# Altium PCB 0007-Optical_Tracker.pcblib.pcbdoc
Units mil, origin at the board's own origin, x right, y up, seen from the top; angles counter-clockwise.
Board outline 6000 x 4000 mil, 2 copper layers (Top Layer, Bottom Layer); 22 components, 0 nets, 193 pads, 0 vias.
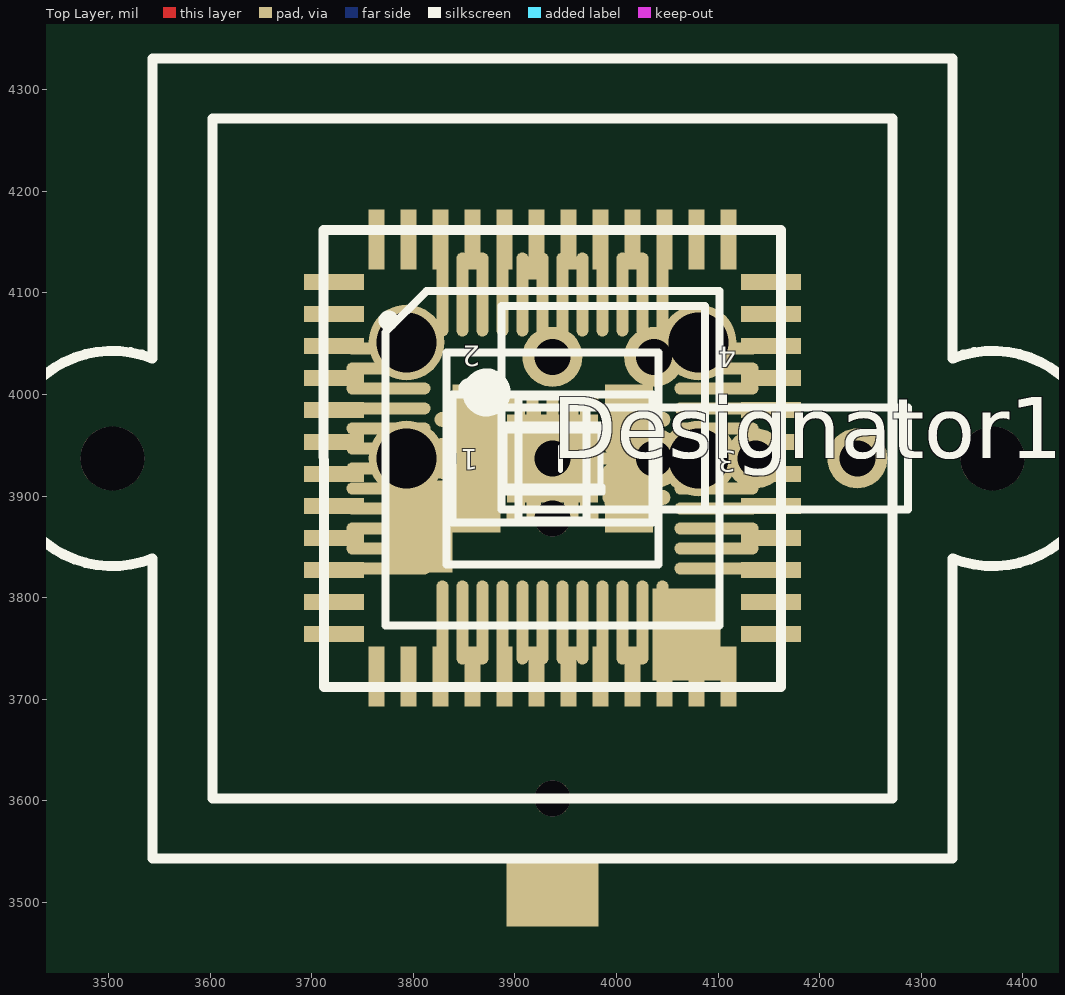
[diagram p0: Top Layer view]
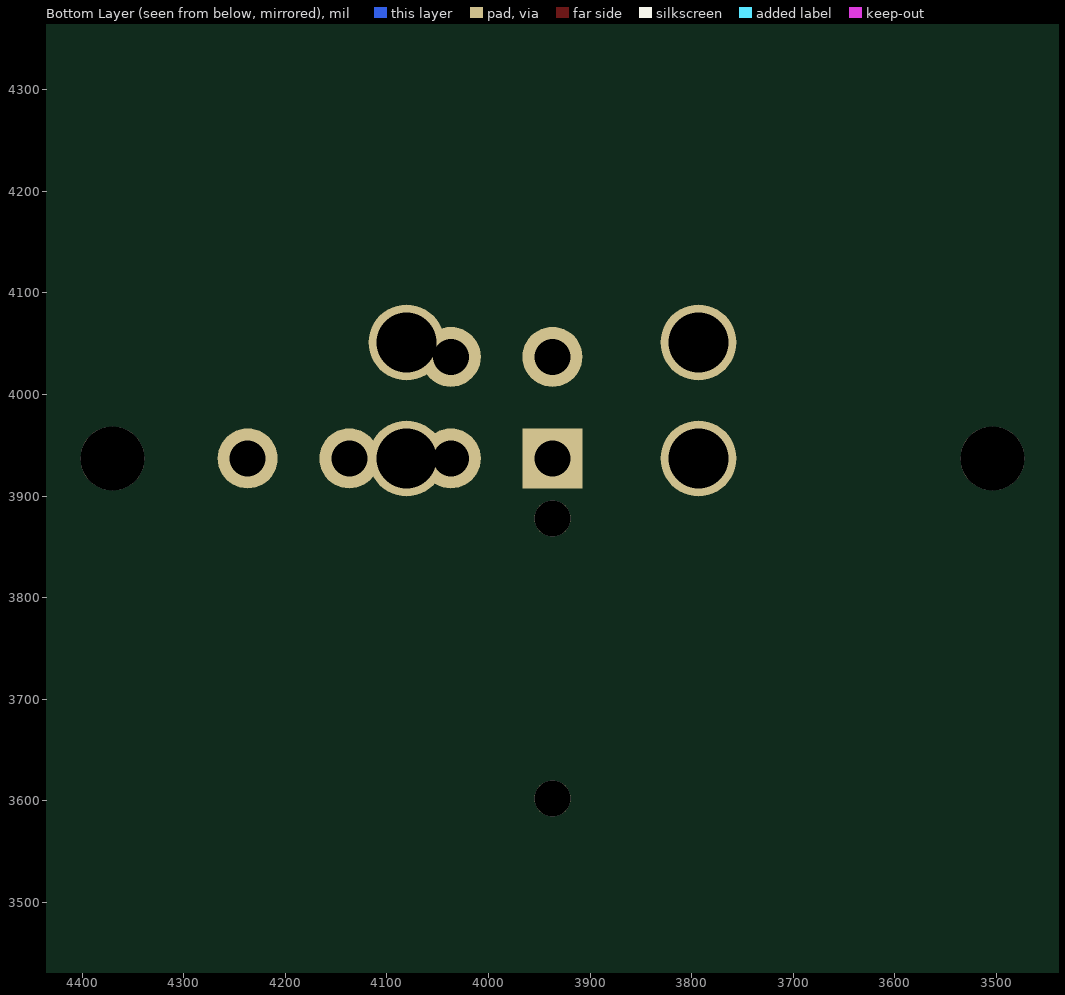
[diagram p1: Bottom Layer view, seen from below]

## Layer stack, top to bottom
Top Solder: solder mask 0.4, Solder Resist, Dk 3.5
Top Layer: signal copper 1.4
Dielectric 1: dielectric 12.6, FR-4, Dk 4.8
Bottom Layer: signal copper 1.4
Bottom Solder: solder mask 0.4, Solder Resist, Dk 3.5

## Board outline
1000,1000 7000,1000 7000,5000 1000,5000

## Design rules (kind name [scope] priority, off if disabled: settings)
AssemblyTestPointUsage [All] p0: scope1count=1 scope1_0_kind=Board scope1_0_value=Board scope2count=1 scope2_0_kind=Board scope2_0_value=Board commentlength=0
AssemblyTestpoint [All] p0: scope1count=1 scope1_0_kind=Board scope1_0_value=Board scope2count=1 scope2_0_kind=Board scope2_0_value=Board commentlength=0
Clearance [All] p0: scope1count=1 scope1_0_kind=Board scope1_0_value=Board scope2count=1 scope2_0_kind=Board scope2_0_value=Board commentlength=0 gap=10
Clearance [All] p1: gap=10 ignorepadtopadclearanceinfootprint=FALSE
ComponentClearance [All] p0: scope1count=1 scope1_0_kind=Board scope1_0_value=Board scope2count=1 scope2_0_kind=Board scope2_0_value=Board commentlength=0 gap=10 collisioncheckmode=3
DiffPairsRouting [All] p0: scope1count=1 scope1_0_kind=Board scope1_0_value=Board scope2count=1 scope2_0_kind=Board scope2_0_value=Board commentlength=0
FabricationTestPointUsage [All] p0: scope1count=1 scope1_0_kind=Board scope1_0_value=Board scope2count=1 scope2_0_kind=Board scope2_0_value=Board commentlength=0 valid=0 allowmultiple=FALSE
FabricationTestpoint [All] p0: scope1count=1 scope1_0_kind=Board scope1_0_value=Board scope2count=1 scope2_0_kind=Board scope2_0_value=Board commentlength=0 side=3 testpointundercomponent=TRUE minsize=40 maxsize=100 preferedsize=60 minholesize=0 maxholesize=40 preferedholesize=32 testpointgrid=1
FanoutControl Fanout_BGA [All] p0 off: scope1count=1 scope1_0_kind=Board scope1_0_value=Board scope2count=1 scope2_0_kind=Board scope2_0_value=Board commentlength=69 // Protel DXP Scope 1 Expression Was: IsBGA   Fanout_BGA (Default Rule)
FanoutControl Fanout_LCC [All] p0 off: scope1count=1 scope1_0_kind=Board scope1_0_value=Board scope2count=1 scope2_0_kind=Board scope2_0_value=Board commentlength=69 // Protel DXP Scope 1 Expression Was: IsLCC   Fanout_LCC (Default Rule)
FanoutControl Fanout_SOIC [All] p0 off: scope1count=1 scope1_0_kind=Board scope1_0_value=Board scope2count=1 scope2_0_kind=Board scope2_0_value=Board commentlength=71 // Protel DXP Scope 1 Expression Was: IsSOIC   Fanout_SOIC (Default Rule)
FanoutControl Fanout_Small [All] p0 off: scope1count=1 scope1_0_kind=Board scope1_0_value=Board scope2count=1 scope2_0_kind=Board scope2_0_value=Board commentlength=84 // Protel DXP Scope 1 Expression Was: (CompPinCount < 5)   Fanout_Small (Default Rule)
FanoutControl Fanout_Default [All] p0: scope1count=1 scope1_0_kind=Board scope1_0_value=Board scope2count=1 scope2_0_kind=Board scope2_0_value=Board commentlength=30 // Fanout_Default (Default Rule)
Height [All] p0: scope1count=1 scope1_0_kind=Board scope1_0_value=Board scope2count=1 scope2_0_kind=Board scope2_0_value=Board commentlength=0
HoleSize [All] p0: scope1count=1 scope1_0_kind=Board scope1_0_value=Board scope2count=1 scope2_0_kind=Board scope2_0_value=Board commentlength=0 absolutevalues=TRUE maxlimit=100 minlimit=1 maxpercent=80.000 minpercent=20.000
HoleToHoleClearance [All] p0: scope1count=1 scope1_0_kind=Board scope1_0_value=Board scope2count=1 scope2_0_kind=Board scope2_0_value=Board commentlength=0
LayerPairs [All] p0: scope1count=1 scope1_0_kind=Board scope1_0_value=Board scope2count=1 scope2_0_kind=Board scope2_0_value=Board commentlength=0 enforce=TRUE
MinimumSolderMaskSliver [All] p0: scope1count=1 scope1_0_kind=Board scope1_0_value=Board scope2count=1 scope2_0_kind=Board scope2_0_value=Board commentlength=0
NetAntennae [All] p0: scope1count=1 scope1_0_kind=Board scope1_0_value=Board scope2count=1 scope2_0_kind=Board scope2_0_value=Board commentlength=0
PasteMaskExpansion [All] p0: scope1count=1 scope1_0_kind=Board scope1_0_value=Board scope2count=1 scope2_0_kind=Board scope2_0_value=Board commentlength=0 expansion=0
PlaneClearance [All] p0: scope1count=1 scope1_0_kind=Board scope1_0_value=Board scope2count=1 scope2_0_kind=Board scope2_0_value=Board commentlength=0 clearance=20
PlaneConnect [All] p0: scope1count=1 scope1_0_kind=Board scope1_0_value=Board scope2count=1 scope2_0_kind=Board scope2_0_value=Board commentlength=0 planeconnectstyle=Relief reliefexpansion=20 reliefentries=4 reliefconductorwidth=10 reliefairgap=10
PolygonConnect [All] p0: scope1count=1 scope1_0_kind=Board scope1_0_value=Board scope2count=1 scope2_0_kind=Board scope2_0_value=Board commentlength=0 connectstyle=Relief reliefconductorwidth=10 reliefentries=4 polygonreliefangle="90 Angle"
PolygonConnect [All] p1: connectstyle=Relief reliefconductorwidth=10 reliefentries=4 polygonreliefangle="90 Angle" airgapwidth=10
RoutingCorners [All] p0: scope1count=1 scope1_0_kind=Board scope1_0_value=Board scope2count=1 scope2_0_kind=Board scope2_0_value=Board commentlength=0 cornerstyle=45-Degree minsetback=100 maxsetback=100
RoutingLayers [All] p0: scope1count=1 scope1_0_kind=Board scope1_0_value=Board scope2count=1 scope2_0_kind=Board scope2_0_value=Board commentlength=0 top layer=Automatic bottom layer=Automatic
RoutingPriority [All] p0: scope1count=1 scope1_0_kind=Board scope1_0_value=Board scope2count=1 scope2_0_kind=Board scope2_0_value=Board commentlength=0
RoutingTopology [All] p0: scope1count=1 scope1_0_kind=Board scope1_0_value=Board scope2count=1 scope2_0_kind=Board scope2_0_value=Board commentlength=0 topology=Shortest
RoutingVias [All] p0: scope1count=1 scope1_0_kind=Board scope1_0_value=Board scope2count=1 scope2_0_kind=Board scope2_0_value=Board commentlength=0 holewidth=28 width=50 viastyle="Through Hole" minholewidth=28 minwidth=50 maxholewidth=28 maxwidth=50
RoutingVias [All] p1: holewidth=28 width=50 viastyle="Through Hole" minholewidth=28 minwidth=50 maxholewidth=28 maxwidth=50
ShortCircuit [All] p0: scope1count=1 scope1_0_kind=Board scope1_0_value=Board scope2count=1 scope2_0_kind=Board scope2_0_value=Board commentlength=0 allowed=FALSE
SilkToBoardRegionClearance [All] p0: scope1count=1 scope1_0_kind=Board scope1_0_value=Board scope2count=1 scope2_0_kind=Board scope2_0_value=Board commentlength=0
SilkToSilkClearance [All] p0: scope1count=1 scope1_0_kind=Board scope1_0_value=Board scope2count=1 scope2_0_kind=Board scope2_0_value=Board commentlength=0
SilkToSolderMaskClearance [All] p0 off: scope1count=1 scope1_0_kind=Board scope1_0_value=Board scope2count=1 scope2_0_kind=Board scope2_0_value=Board commentlength=44 // Protel DXP Scope 1 Expression Was: IsPad
SolderMaskExpansion [All] p0: scope1count=1 scope1_0_kind=Board scope1_0_value=Board scope2count=1 scope2_0_kind=Board scope2_0_value=Board commentlength=0 expansion=4
SolderMaskExpansion [All] p1: expansion=4 istentingtop=FALSE
UnRoutedNet [All] p0: scope1count=1 scope1_0_kind=Board scope1_0_value=Board scope2count=1 scope2_0_kind=Board scope2_0_value=Board commentlength=0
UnpouredPolygon [All] p0: scope1count=1 scope1_0_kind=Board scope1_0_value=Board scope2count=1 scope2_0_kind=Board scope2_0_value=Board commentlength=0
Width [All] p0: scope1count=1 scope1_0_kind=Board scope1_0_value=Board scope2count=1 scope2_0_kind=Board scope2_0_value=Board commentlength=0 maxlimit=10 minlimit=10 preferedwidth=10
Width [All] p1: maxlimit=10 minlimit=10 preferedwidth=10
30 further rules are at their usual default settings.

## Components (designator, comment, footprint, x,y, rotation, side; value= is the part's Value field where it differs from the comment)
Designator1 "Comment" CAP_CERAMIC_0603 3937.01,3937.01 r0 top
Designator1 "Comment" CAP_CERAMIC_0402 3937.01,3937.01 r0 top
Designator1 "Comment" TEST_POINT_PAD 3937.01,3937.01 r0 top
Designator1 "Comment" LED_GREEN_0603 3937.01,3937.01 r0 top
Designator1 "Comment" RESISTOR_0603 3937.01,3937.01 r0 top
Designator1 "Comment" RESISTOR_0402 3937.01,3937.01 r0 top
Designator1 "Comment" LED_BLUE_0603 3937.01,3937.01 r0 top
Designator1 "Comment" KYCON_STX2500 3937.01,3937.01 r0 top
Designator1 "Comment" INDUCTOR_0603 3937.01,3937.01 r0 top
Designator1 "Comment" MSOP-MS8_N 3937.01,3937.01 r0 top
Designator1 "Comment" 0513870578 3937.01,3937.01 r0 top
Designator1 "Comment" LQFP-48_M 3937.01,3937.01 r0 top
Designator1 "Comment" TSOP6456 3937.01,3937.01 r0 top
Designator1 "Comment" 20-UFQFN 3937.01,3937.01 r0 top
Designator1 "Comment" UQFN-6L 3937.01,3937.01 r0 top
Designator1 "Comment" CLCC-48 3937.01,3937.01 r0 top
Designator1 "Comment" UDFN-6 3937.01,3937.01 r0 top
Designator1 "Comment" HDR2X2 3937.01,3937.01 r0 top
Designator1 "Comment" HDR1X4 3937.01,3937.01 r0 top
Designator1 "Comment" CMT103 3937.01,3937.01 r0 top
Designator1 "Comment" 10-DFN 3937.01,3937.01 r0 top
Designator1 "Comment" 4-SMD 3937.01,3937.01 r0 top

## Footprints (in the part's own frame and the unit in brackets; to place one, negate y for a bottom-side part, rotate by r counter-clockwise, add the part's x,y. Pads: shape width x height; smd on the part's side, far side on the other; paste and mask are expansions set on the pad)
4-SMD [mm]
  rect 1.2x1.5 smd: 1(-1.9,-1.1) 2(1.91,-1.1) 3(1.91,1.1) 4(-1.9,1.1)
  silkscreen extent -2.5,-1.6 2.5,1.6
10-DFN [mm]
  rect 0.225x0.6 smd: 1(0.8,0.9) 2(0.4,0.9) 3(0,0.9) 4(-0.4,0.9) 5(-0.8,0.9) 6(-0.8,-0.9) 7(-0.4,-0.9) 8(0,-0.9) 9(0.4,-0.9) 10(0.8,-0.9)
20-UFQFN [mm] "20-lead ultra thin fine pitch quad flat no-lead package (3x3)"
  rect 0.3x0.3 smd mask+0: 1(1.45,-1) 5(1.45,1) 6(1,1.45) 10(-1,1.45) 11(-1.45,1) 15(-1.45,-1) 16(-1,-1.45) 20(1,-1.45)
  rect 0.7x0.3 smd mask+0: 2(1.25,-0.5) 3(1.25,0) 4(1.25,0.5) 12(-1.25,0.5) 13(-1.25,0) 14(-1.25,-0.5)
  rect 0.3x0.7 smd mask+0: 7(0.5,1.25) 8(0,1.25) 9(-0.5,1.25) 17(-0.5,-1.25) 18(0,-1.25) 19(0.5,-1.25)
0513870578 [mm] "CONN RECEPT MINIUSB R/A 5POS SMD"
  rect 0.5x1.6 smd: 1(1.6,0) 2(0.8,0) 3(0,0) 4(-0.8,0) 5(-1.6,0)
  round 1.9 hole 1.5: 5(3.65,0) 6(-3.65,0) 7(-3.65,2.9) 8(3.65,2.9)
CAP_CERAMIC_0402 [mil]
  rect 15x20 smd mask+0: 1(-20,0) 2(20,0)
CAP_CERAMIC_0603 [mil]
  rect 25x30 smd mask+0: 1(-25,0) 2(25,0)
CLCC-48 [mm]
  rect 0.4x1.75 smd: 1(-0.4,5.35)
  rect 0.4x1.5 smd: 2(-1.2,5.475) 3(-2,5.475) 4(-2.8,5.475) 5(-3.6,5.475) 6(-4.4,5.475) 19(-4.4,-5.455) 20(-3.6,-5.455) 21(-2.8,-5.455) 22(-2,-5.455) 23(-1.2,-5.455) 24(-0.4,-5.455) 25(0.4,-5.455) 26(1.2,-5.455) 27(2,-5.455) 28(2.8,-5.455) 29(3.6,-5.455) 30(4.4,-5.455) 43(4.4,5.475) 44(3.6,5.475) 45(2.8,5.475) 46(2,5.475) 47(1.2,5.475) 48(0.4,5.475)
  rect 1.5x0.4 smd: 7(-5.465,4.41) 8(-5.465,3.61) 9(-5.465,2.81) 10(-5.465,2.01) 11(-5.465,1.21) 12(-5.465,0.41) 13(-5.465,-0.39) 14(-5.465,-1.19) 15(-5.465,-1.99) 16(-5.465,-2.79) 17(-5.465,-3.59) 18(-5.465,-4.39) 31(5.465,-4.39) 32(5.465,-3.59) 33(5.465,-2.79) 34(5.465,-1.99) 35(5.465,-1.19) 36(5.465,-0.39) 37(5.465,0.41) 38(5.465,1.21) 39(5.465,2.01) 40(5.465,2.81) 41(5.465,3.61) 42(5.465,4.41)
  silkscreen extent -5.72,-5.71 5.71,5.71
CMT103 [mm]
  round 1.6 hole 1.6 unplated: 1(11,0) 2(-11,0)
  silkscreen extent -13.69,-10 13.69,10
HDR1X4 [mm] "Connector; Header; 4 Position"
  rect 1.5x1.5 hole 0.9: 1(0,0)
  round 1.5 hole 0.9: 2(2.54,0) 3(5.08,0) 4(7.62,0)
  silkscreen extent -1.27,-1.27 8.89,1.27
HDR2X2 [mm] "Connector; Header; 2x2 Position"
  rect 1.5x1.5 hole 0.9: 1(0,0)
  round 1.5 hole 0.9: 2(0,2.54) 3(2.54,0) 4(2.54,2.54)
  silkscreen extent -1.27,-1.27 3.81,3.81
INDUCTOR_0603 [mil]
  rect 25x30 smd mask+0: 1(-25,0) 2(25,0)
KYCON_STX2500 [mm]
  rect 1.7x2.3 smd paste+0 mask+0: 1(-3.35,-1.7) 2(3.35,-4.4)
  rect 2.3x1.7 smd paste+0 mask+0: 3(0,-10.85)
  round 0.9 hole 0.9 unplated paste+0 mask+0: ""(0,-8.5) ""(0,-1.5)
LED_BLUE_0603 [mm]
  rect 0.6x1 smd mask+0: 1(-0.7,0) 2(0.7,0)
  silkscreen extent -1.2,-0.7 1.2,0.7
LED_GREEN_0603 [mm]
  rect 0.6x1 smd mask+0: 1(-0.7,0) 2(0.7,0)
  silkscreen extent -1.2,-0.7 1.2,0.7
LQFP-48_M [mm] "48-Pin Thin Quad Flat Pack 0.5 mm Pitch, IPC Low Density"
  oval 2.1x0.3 smd: 1(-4.1,2.75) 2(-4.1,2.25) 3(-4.1,1.75) 4(-4.1,1.25) 5(-4.1,0.75) 6(-4.1,0.25) 7(-4.1,-0.25) 8(-4.1,-0.75) 9(-4.1,-1.25) 10(-4.1,-1.75) 11(-4.1,-2.25) 12(-4.1,-2.75) 25(4.1,-2.75) 26(4.1,-2.25) 27(4.1,-1.75) 28(4.1,-1.25) 29(4.1,-0.75) 30(4.1,-0.25) 31(4.1,0.25) 32(4.1,0.75) 33(4.1,1.25) 34(4.1,1.75) 35(4.1,2.25) 36(4.1,2.75)
  oval 0.3x2.1 smd: 13(-2.75,-4.1) 14(-2.25,-4.1) 15(-1.75,-4.1) 16(-1.25,-4.1) 17(-0.75,-4.1) 18(-0.25,-4.1) 19(0.25,-4.1) 20(0.75,-4.1) 21(1.25,-4.1) 22(1.75,-4.1) 23(2.25,-4.1) 24(2.75,-4.1) 37(2.75,4.1) 38(2.25,4.1) 39(1.75,4.1) 40(1.25,4.1) 41(0.75,4.1) 42(0.25,4.1) 43(-0.25,4.1) 44(-0.75,4.1) 45(-1.25,4.1) 46(-1.75,4.1) 47(-2.25,4.1) 48(-2.75,4.1)
  silkscreen extent -4.22,-2.65 2.65,3.57
MSOP-MS8_N [mm] "TSOP, 8-Leads, Body 3x3mm, Pitch 0.65mm, IPC Medium Density"
  oval 1.7x0.375 smd: 1(-2.1,0.975) 2(-2.1,0.325) 3(-2.1,-0.325) 4(-2.1,-0.975) 5(2.1,-0.975) 6(2.1,-0.325) 7(2.1,0.325) 8(2.1,0.975)
  silkscreen extent -2.22,-1.55 0.85,1.87
RESISTOR_0402 [mil]
  rect 15x20 smd mask+0: 1(-20,0) 2(20,0)
RESISTOR_0603 [mil]
  rect 25x30 smd mask+0: 1(-25,0) 2(25,0)
TEST_POINT_PAD [mil]
  round 40 smd mask+0: 1(0,0)
TSOP6456 [mm]
  rect 1x2.2 smd: 1(-1.905,0) 2(-0.635,0) 3(0.635,0) 3(1.905,0)
  Mechanical 13 keep-out region: 0.365,0.382 0.935,0.382 0.935,0.618 0.365,0.618
UDFN-6 [mm]
  rect 0.42x0.22 smd mask+0: 1(-0.86,0.4) 2(-0.86,0) 3(-0.86,-0.4) 4(0.86,-0.4) 5(0.86,0) 6(0.86,0.4)
  silkscreen extent -1.25,-0.85 1.25,0.85
UQFN-6L [mm]
  rect 0.6x0.25 smd paste-0.3 mask+0: 1(-0.65,0.5) 2(-0.65,0) 3(-0.65,-0.5) 4(0.65,-0.5) 5(0.65,0) 6(0.65,0.5)
  silkscreen extent -0.75,-0.85 0.75,0.85

## Nets (pads, with @x,y where several pads share a name; then routed paths per layer and width w, separated by ;. In a path a pad name is that pad's centre, name@x,y a point inside that pad or via, vN(x,y) a via of type N, cw(c..) or ccw(c..) an arc to the next point about the centre after c; other vN are vias at no path point)
pads on no net: Designator1. Designator1.1 Designator1.2 Designator1.3 Designator1.4 Designator1.5 Designator1.6 Designator1.7 Designator1.8 Designator1.9 Designator1.10 Designator1.11 Designator1.12 Designator1.13 Designator1.14 Designator1.15 Designator1.16 Designator1.17 Designator1.18 Designator1.19 Designator1.20 Designator1.21 Designator1.22 Designator1.23 Designator1.24 Designator1.25 Designator1.26 Designator1.27 Designator1.28 Designator1.29 Designator1.30 Designator1.31 Designator1.32 Designator1.33 Designator1.34 Designator1.35 Designator1.36 Designator1.37 Designator1.38 Designator1.39 Designator1.40 Designator1.41 Designator1.42 Designator1.43 Designator1.44 Designator1.45 Designator1.46 Designator1.47 Designator1.48

## Text inside footprints (layer, text, board x,y; h text height)
Designator1: Top Overlay "3" at 4118.01,3944.01 h20 r180; Top Overlay "4" at 4118.01,4047.01 h20 r180; Top Overlay "2" at 3866.01,4048.01 h20 r180; Top Overlay "1" at 3864.01,3946.01 h20 r180